# Altium PCB DSO.PcbDoc
Units mm, origin at the board's own origin, x right, y up, seen from the top; angles counter-clockwise.
Board outline 110 x 100 mm, 2 copper layers (Top Layer, Bottom Layer), stack 1.571 mm thick; 145 components, 121 nets, 556 pads, 27 vias.
Unrouted connection lines stored in the file: 193.
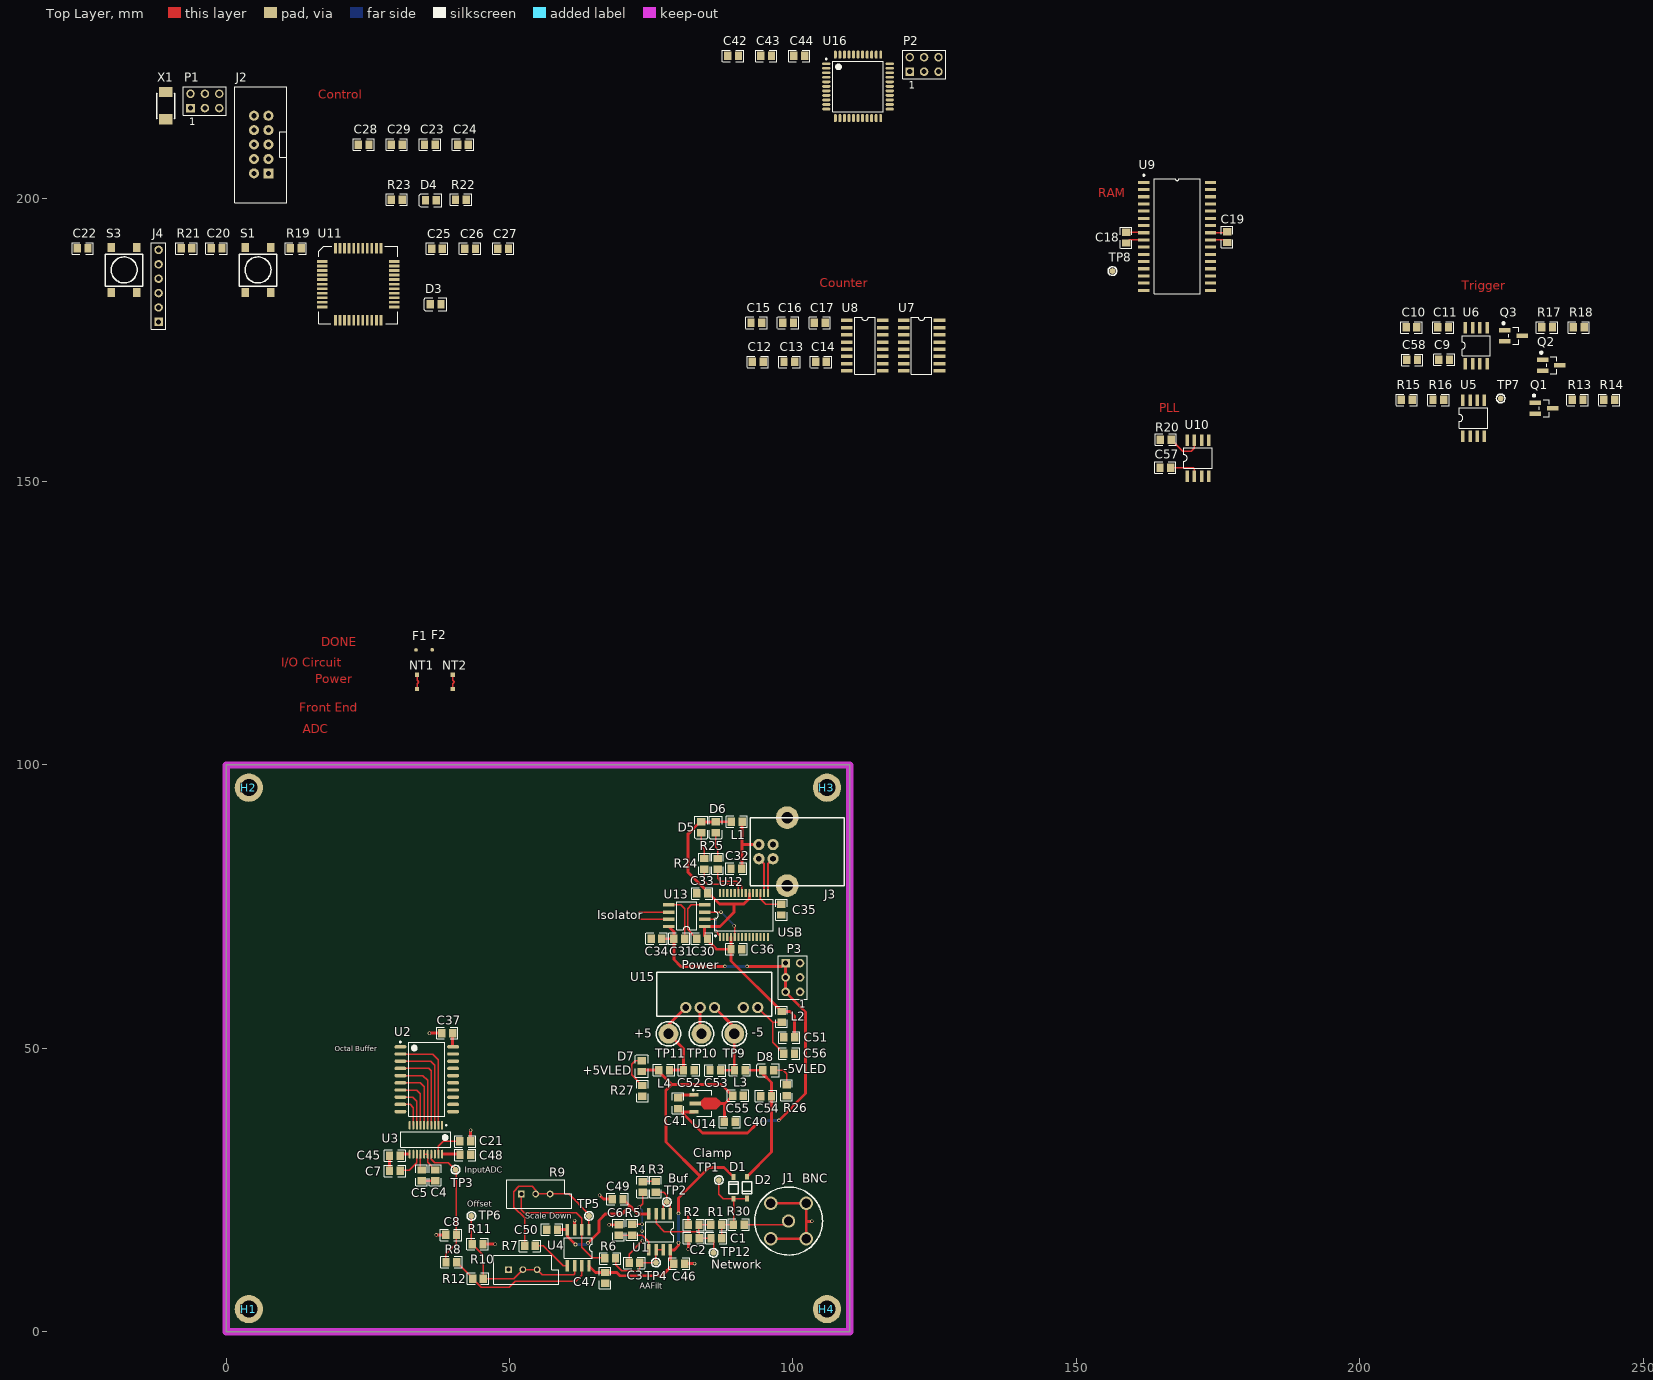
[diagram p0: Top Layer view]
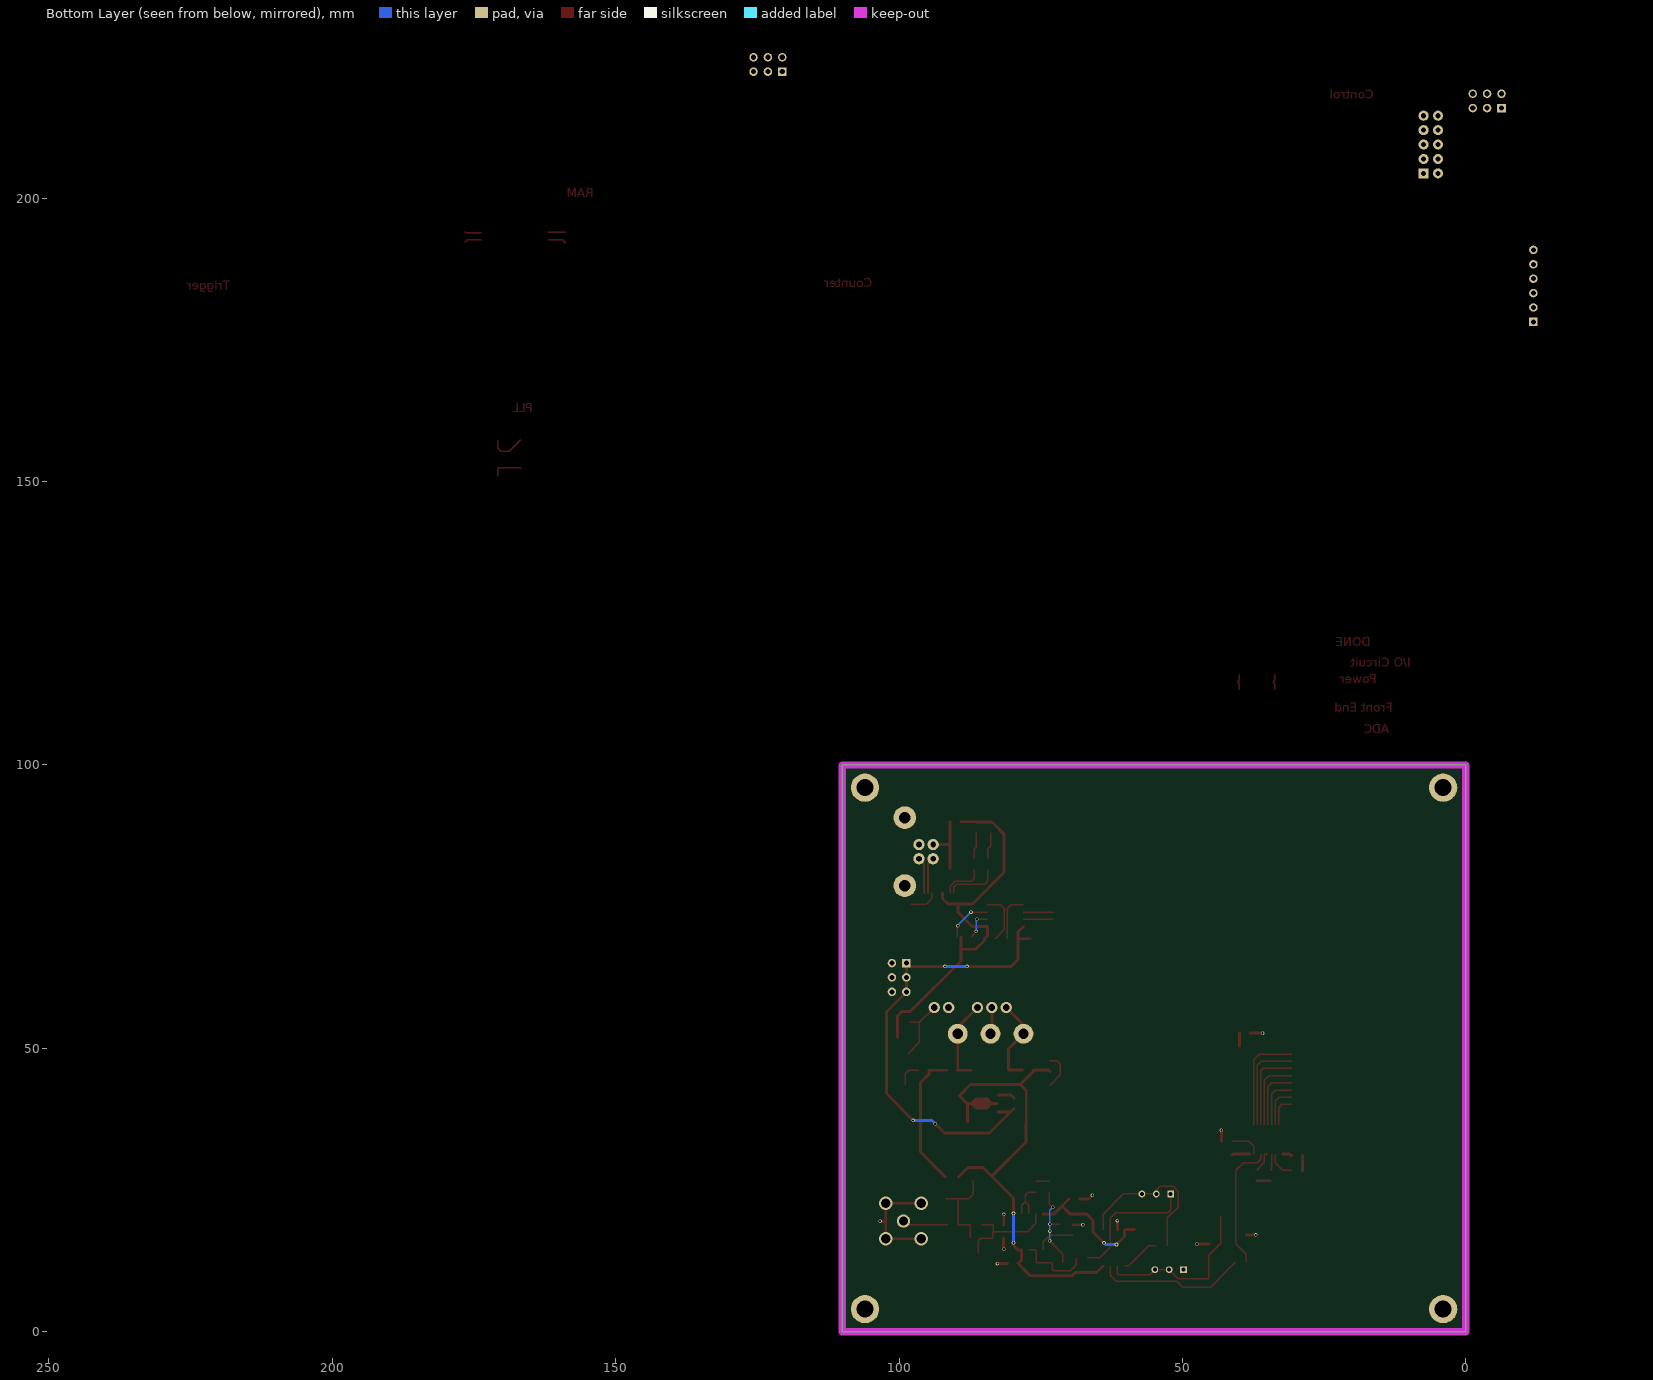
[diagram p1: Bottom Layer view, seen from below]

## Layer stack, top to bottom
Top Solder: solder mask 0.0102, Solder Resist, Dk 3.5
Top Layer: signal copper 0.0356
Dielectric1: core 1.5, FR-4, Dk 4.8
Bottom Layer: signal copper 0.0356
Bottom Solder: solder mask 0.0102, Solder Resist, Dk 3.5

## Board outline
0,0 110,0 110,100 0,100

## Design rules (kind name [scope] priority, off if disabled: settings)
Clearance [All] p1: gap=0.254
ComponentClearance [All] p1 off: gap=0.254 collisioncheckmode=3 verticalgap=0.254 showdistances=FALSE
DiffPairsRouting [All] p1: maxlimit=0.508 minlimit=0.254 mostfreqgap=0.254 toplayer_minwidth=0.381 toplayer_maxwidth=0.381 toplayer_prefwidth=0.381 bottomlayer_minwidth=0.381 bottomlayer_maxwidth=0.381 bottomlayer_prefwidth=0.381 maxuncoupledlength=12.7
FabricationTestPointUsage TestPointUsage [All] p1: valid=0 allowmultiple=FALSE
FabricationTestpoint Testpoint [All] p1: side=3 testpointundercomponent=TRUE minsize=1.016 maxsize=2.54 preferedsize=1.524 minholesize=0 maxholesize=1.016 preferedholesize=0.813 testpointgrid=0.025 allowsidetop=TRUE allowsidebottom=TRUE usegrid=TRUE gridtolerance=0
Height [All] p1: minheight=0 maxheight=200 prefheight=12.7
HoleSize [All] p1: absolutevalues=TRUE maxlimit=5.055 minlimit=0.381 maxpercent=80.000 minpercent=20.000
MinimumAnnularRing [All] p1: minimumring=0.127
PolygonConnect PolygonConnect_2 [(ObjectKind = 'Via') vs IsNamedPolygon('Bottom Layer-No Net') Or  IsNamedPolygon('Top Power') Or  IsNamedPolygon('TOP MCU VCC') Or  IsNamedPolygon('Top Analog') Or  IsNamedPolygon('Top USB') Or  IsNamedPolygon('Top Digital') Or  IsNamedPolygon('Top RAM VCC') Or  IsNamedPolygon('Bottom Power') Or  IsNamedPolygon('Bottom Analog') Or  IsNamedPolygon('Bottom Digital')] p1: connectstyle=Direct reliefconductorwidth=0.254 reliefentries=4 polygonreliefangle="90 Angle" airgapwidth=0.254
PolygonConnect PolygonConnect_1 [(ObjectKind = 'Via')] p2 off: connectstyle=Direct reliefconductorwidth=0.254 reliefentries=4 polygonreliefangle="90 Angle" airgapwidth=0.254
PolygonConnect [All] p3 off: connectstyle=Relief reliefconductorwidth=0.254 reliefentries=4 polygonreliefangle="90 Angle" airgapwidth=0.254
RoutingVias [All] p1: holewidth=0.381 width=0.635 viastyle="Through Hole" minholewidth=0.381 minwidth=0.635 maxholewidth=2.032 maxwidth=2.54
SilkToSolderMaskClearance SilkscreenOverComponentPads [IsPad] p1: minsilkscreentomaskgap=0.254 clearancetoexposedcopper=TRUE
SolderMaskExpansion [All] p1: expansion=0.152
Width USB_VCC_NET_WIDTH [InNet('USB_VCC_NET')] p1: maxlimit=0.508 minlimit=0.508 preferedwidth=0.508 minimp=50.000000 maximp=50.000000 favimp=50.000000
Width USBVCC_WIDTH [InNet('USBVCC')] p2: maxlimit=0.508 minlimit=0.508 preferedwidth=0.508 minimp=50.000000 maximp=50.000000 favimp=50.000000
Width +5_OUT [InNet('+5_OUTOFDC')] p3: maxlimit=0.508 minlimit=0.508 preferedwidth=0.508 minimp=50.000000 maximp=50.000000 favimp=50.000000
Width -5_OUT [InNet('-5_OUTOFDC')] p4: maxlimit=0.508 minlimit=0.508 preferedwidth=0.508 minimp=50.000000 maximp=50.000000 favimp=50.000000
Width +AVCC_WIDTH [InNet('+AVCC')] p5: maxlimit=0.508 minlimit=0.508 preferedwidth=0.508 minimp=50.000000 maximp=50.000000 favimp=50.000000
Width -AVCC_WIDTH [InNet('-AVCC')] p6: maxlimit=0.508 minlimit=0.508 preferedwidth=0.508 minimp=50.000000 maximp=50.000000 favimp=50.000000
Width DVCC_WIDTH [InNet('DVCC')] p7: maxlimit=0.508 minlimit=0.508 preferedwidth=0.508 minimp=50.000000 maximp=50.000000 favimp=50.000000
Width USB_GND_WIDTH [InNet('USBGND')] p8: maxlimit=0.508 minlimit=0.508 preferedwidth=0.508 minimp=50.000000 maximp=50.000000 favimp=50.000000
Width AGND_WIDTH [InNet('AGND')] p9: maxlimit=0.508 minlimit=0.508 preferedwidth=0.508 minimp=50.000000 maximp=50.000000 favimp=50.000000
Width PGND_WIDTH [InNet('PGND')] p10: maxlimit=0.508 minlimit=0.508 preferedwidth=0.508 minimp=50.000000 maximp=50.000000 favimp=50.000000
Width DGND_WIDTH [InNet('DGND')] p11: maxlimit=0.508 minlimit=0.508 preferedwidth=0.508 minimp=50.000000 maximp=50.000000 favimp=50.000000
Width Width_2 [All] p12: maxlimit=0.254 minlimit=0.254 preferedwidth=0.254
Width Width_1 [All] p13: maxlimit=0.254 minlimit=0.254 preferedwidth=0.254
23 further rules are at their usual default settings.

## Classes and differential pairs
component class U_DSO_Trig: C9 C10 C11 C58 Q1 Q2 Q3 R13 R14 R15 R16 R17 R18 TP7 U5 U6
component class U_DSO_ADC: C3 C4 C5 C6 C7 C8 C21 C37 C45 C46 C47 C48 C49 C50 R3 R4 R5 R6 R7 R8 R9 R10 R11 R12 TP3 TP4 TP5 TP6 U2 U3 U4
net class ADC_D[0..7]: ADC_D0 ADC_D1 ADC_D2 ADC_D3 ADC_D4 ADC_D5 ADC_D6 ADC_D7
net class ADC_A[0..15]: ADC_A0 ADC_A1 ADC_A2 ADC_A3 ADC_A4 ADC_A5 ADC_A6 ADC_A7 ADC_A8 ADC_A9 ADC_A10 ADC_A11 ADC_A12 ADC_A13 ADC_A14 ADC_A15
component class U_DSO_RAM: C18 C19 TP8 U9
component class U_DSO_Power: C40 C41 C51 C52 C53 C54 C55 C56 D7 D8 F1 F2 H1 H2 H3 H4 L2 L3 L4 NT1 NT2 P3 R26 R27 TP9 TP10 TP11 U14 U15
component class U_DSO_IO: C30 C31 C32 C33 C34 C35 C36 D5 D6 J3 L1 R24 R25 U12 U13
component class U_DSO_Front: C1 C2 D1 D2 J1 R1 R2 R30 TP1 TP2 TP12 U1
component class U_DSO_Counters: C12 C13 C14 C15 C16 C17 U7 U8
component class U_DSO_Control: C20 C22 C23 C24 C25 C26 C27 C28 C29 D3 D4 J2 J4 P1 R19 R21 R22 R23 S1 S3 U11 X1
component class U_DSO_Clock: C57 R20 U10
component class U_DSO_CPLD: C42 C43 C44 P2 U16
differential pair USB: +USB_P -USB_N

## Components (designator, comment, footprint, x,y, rotation, side; value= is the part's Value field where it differs from the comment)
C1 "5pF" 0805C 86.477,16.535 r180 top
C2 "5pF" 0805C 82.489,16.535 r180 top
C3 "22pF" 0805C 72.034,12.167 r180 top
C4 "0.1uF" 0805C 36.881,27.584 r90 top
C5 "0.1uF" 0805C 34.493,27.584 r90 top
C6 "10pF" 0805C 69.215,17.958 r90 top
C7 "0.1uF" 0805C 29.769,28.372 r0 top
C8 "47pF" 0805C 39.675,17.094 r180 top
C9 "100nF" 0805C 214.884,171.501 r0 top
C10 "100nF" 0805C 209.125,177.214 r0 top
C11 "100nF" 0805C 214.713,177.214 r0 top
C12 "100nF" 0805C 93.773,171.143 r0 top
C13 "100nF" 0805C 99.361,171.143 r0 top
C14 "100nF" 0805C 104.949,171.143 r0 top
C15 "100nF" 0805C 93.544,178.027 r0 top
C16 "100nF" 0805C 99.132,178.027 r0 top
C17 "100nF" 0805C 104.72,178.027 r0 top
C18 "100nF" 0805C 158.801,193.04 r270 top
C19 "100nF" 0805C 176.581,193.142 r90 top
C20 "100nF" 0805C -1.706,191.133 r0 top
C21 "100nF" 0805C 42.164,33.579 r0 top
C22 "100nF" 0805C -25.328,191.133 r0 top
C23 "100nF" 0805C 35.937,209.472 r0 top
C24 "100nF" 0805C 41.779,209.472 r0 top
C25 "100nF" 0805C 37.181,191.108 r0 top
C26 "100nF" 0805C 43.023,191.108 r0 top
C27 "100nF" 0805C 48.865,191.108 r0 top
C28 "18pF" 0805C 24.253,209.472 r0 top
C29 "18pF" 0805C 30.095,209.472 r0 top
C30 "100nF" 0805C 83.972,69.342 r180 top
C31 "100nF" 0805C 79.934,69.342 r0 top
C32 "100nF" 0805C 90.018,81.712 r180 top
C33 "1uF" 0805C 83.998,77.343 r180 top
C34 "1uF" 0805C 75.921,69.342 r0 top
C35 "100nF" 0805C 97.968,74.473 r270 top
C36 "100nF" 0805C 90.018,67.488 r0 top
C37 "100nF" 0805C 38.989,52.68 r180 top
C40 "1uF" 0805C 88.849,37.033 r0 top
C41 "1uF" 0805C 79.731,40.31 r90 top
C42 "100nF" 0805C 89.429,225.118 r0 top
C43 "100nF" 0805C 95.271,225.118 r0 top
C44 "100nF" 0805C 101.113,225.118 r0 top
C45 "100nF" 0805C 29.769,31.064 r180 top
C46 "100nF" 0805C 79.934,12.014 r0 top
C47 "100nF" 0805C 66.853,9.5 r270 top
C48 "100nF" 0805C 42.189,31.191 r0 top
C49 "100nF" 0805C 69.063,23.393 r180 top
C50 "100nF" 0805C 57.506,18.009 r180 top
C51 "100nF" 0805C 99.339,51.918 r180 top
C52 "10uF" 0805C 81.63,46.152 r0 top
C53 "10uF" 0805C 86.304,46.126 r180 top
C54 "100nF" 0805C 95.26,41.58 r180 top
C55 "100nF" 0805C 90.297,41.646 r0 top
C56 "10uF" 0805C 99.314,49.073 r0 top
C57 "100nF" 0805C 165.71,152.476 r180 top
C58 "10uF" 0805C 209.245,171.475 r0 top
D1 "Diode" SOD-123 89.51,25.375 r270 top
D2 "Diode" SOD-123 91.872,25.425 r90 top
D3 "LED_TRIG" 0805D-GREEN 36.953,181.278 r0 top
D4 "LED_DATA" 0805D-GREEN 36.115,199.642 r0 top
D5 "TX" 0805D-GREEN 83.82,89.002 r90 top
D6 "RX" 0805D-RED 86.36,89.002 r90 top
D7 "LED_+5" 0805D-GREEN 73.355,46.863 r270 top
D8 "LED_-5" 0805D-RED 95.631,46.126 r0 top
F1 "Fiducial" Fiducial 33.481,120.296 r0 top
F2 "Fiducial" Fiducial 36.347,120.32 r0 top
H1 "SCREW_HOLE" SCREW_HOLE 4,4 r0 top
H2 "SCREW_HOLE" SCREW_HOLE 4,96 r0 top
H3 "SCREW_HOLE" SCREW_HOLE 106,96 r0 top
H4 "SCREW_HOLE" SCREW_HOLE 106,4 r0 top
J1 "INPUT" BNC_VERT 99.212,19.533 r0 top
J2 "JTAG" BOXEDVERT10 7.438,204.392 r90 top
J3 "USB" USBPLUG 92.481,90.703 r270 top
J4 "Peripheral Chip Pins" HDR1X6 -11.942,178.179 r90 top
L1 "300mH" 0805 90.068,89.992 r0 top
L2 "300mA" 0805 98.003,55.55 r90 top
L3 "300mA" 0805 90.637,46.152 r180 top
L4 "300mA" 0805 77.251,46.152 r180 top
NT1 "NET_TIE" NET_TIE 33.676,113.384 r90 top net-tie
NT2 "NET_TIE" NET_TIE 39.954,113.384 r90 top net-tie
P1 "Header 3x2" HDR3x2 -3.763,217.168 r0 top
P2 "Header 3x2" HDR3x2 123.135,223.594 r0 top
P3 "Header 3x2" HDR3x2 99.974,62.509 r270 top
Q1 "BSS138" SOT23 232.519,162.939 r0 top
Q2 "BSS138" SOT23 233.807,170.51 r0 top
Q3 "BSS138" SOT23 227.134,175.715 r0 top
R1 "510K" 0805 86.451,18.872 r0 top
R2 "510K" 0805 82.464,18.847 r0 top
R3 "330" 0805 75.768,25.563 r270 top
R4 "270" 0805 73.482,25.537 r90 top
R5 "330" 0805 71.603,17.983 r270 top
R6 "499" 0805 67.742,12.929 r0 top
R7 "499" 0805 53.594,15.138 r180 top
R8 "39" 0805 39.726,12.268 r0 top
R9 "RPot" VR5 54.61,24.308 r0 top
R10 "RPot" VR5 52.324,10.947 r0 top
R11 "499" 0805 44.348,15.469 r0 top
R12 "499" 0805 44.425,9.373 r0 top
R13 "10K" 0805 238.437,164.438 r0 top
R14 "10K" 0805 244.025,164.438 r0 top
R15 "10K" 0805 208.287,164.438 r0 top
R16 "10K" 0805 213.875,164.438 r0 top
R17 "10K" 0805 233.052,177.214 r0 top
R18 "10K" 0805 238.64,177.214 r0 top
R19 "10k" 0805 12.264,191.133 r0 top
R20 "2.7K" 0805 165.76,157.404 r180 top
R21 "10k" 0805 -7.015,191.133 r0 top
R22 "220" 0805 41.398,199.744 r0 top
R23 "220" 0805 30.095,199.744 r0 top
R24 "270" 0805 84.353,82.55 r90 top
R25 "270" 0805 86.69,82.55 r90 top
R26 "330" 0805 98.882,42.596 r270 top
R27 "330" 0805 73.431,42.494 r270 top
R30 "100" 0805 90.439,18.898 r0 top
S1 "RESET" "SPST PB SWITCH SMD" 5.609,187.323 r90 top
S3 "TRIG" "SPST PB SWITCH SMD" -18.013,187.323 r90 top
TP1 "INPUT" Testpoin 86.919,26.746 r0 top
TP2 "INPUT" Testpoin 77.749,22.911 r90 top
TP3 "INPUT" Testpoin 40.462,28.6 r270 top
TP4 "INPUT" Testpoin 75.819,12.192 r90 top
TP5 "INPUT" Testpoin 64.008,20.422 r90 top
TP6 "INPUT" Testpoin 43.256,20.422 r90 top
TP7 "INPUT" Testpoin 224.873,164.666 r90 top
TP8 "INPUT" Testpoin 156.362,187.147 r90 top
TP9 "-5" "PIN 1.8mm" 89.646,52.578 r180 top
TP10 "GND" "PIN 1.8mm" 83.855,52.578 r180 top
TP11 "+5" "PIN 1.8mm" 78.039,52.578 r180 top
TP12 "INPUT" Testpoin 85.977,13.919 r90 top
U1 "LT1819" SOIC-8 76.479,17.628 r270 top
U2 "74HC541" SOT163-1_N 35.382,44.552 r0 top
U3 "ADS830E" TI-DBQ20_L 35.23,33.884 r270 top
U4 "LT1819" SOIC-8 62.103,14.783 r270 top
U5 "MCP4901" SOIC-8 220.098,161.212 r90 top
U6 "MAX9032" SOIC-8 220.555,173.988 r90 top
U7 "74HC590" SOIC-16 122.678,173.988 r0 top
U8 "74HC590" SOIC-16 112.696,173.988 r0 top
U9 "CY7C1019D" TSOP-32 167.788,193.267 r0 top
U10 "PT7C4511" SOIC-8 171.45,154.159 r90 top
U11 "ATMEGA16" QFP-48 23.288,184.834 r0 top
U12 "FT232RL" SSOP-28 91.338,73.533 r90 top
U13 "Si8421" SOIC-8 81.229,73.406 r180 top
U14 "MCP1700T-3302E/MB" SOT89 84.43,40.284 r0 top
U15 "RD0505D" SIP_NMG 93.787,57.201 r270 top
U16 "XC9536XL-10VQ44C" VQ44_L 111.476,219.734 r0 top
X1 "10Mhz" XTAL_FLAT_SMD -10.672,216.33 r90 top

## Footprints (in the part's own frame and the unit in brackets; to place one, negate y for a bottom-side part, rotate by r counter-clockwise, add the part's x,y. Pads: shape width x height; smd on the part's side, far side on the other; paste and mask are expansions set on the pad)
0805 [mm] "0805 Footprint"
  rect 1.3x1.5 smd: 1(-0.95,0) 2(0.95,0)
  silkscreen extent -1.87,-1.02 1.88,1.02, body extent -1,-0.63 1,0.62, height 0.5
0805C [mm] "0805 Footprint"
  rect 1.3x1.5 smd: 1(-0.95,0) 2(0.95,0)
  silkscreen extent -1.87,-1.02 1.88,1.02, body extent -1,-0.62 1,0.63, height 0.78
0805D-GREEN [mm] "0805 Diode"
  rect 1.3x1.5 smd: A(0.95,0) K(-0.95,0)
  silkscreen extent -2.03,-1.14 1.95,1.12, body extent -1.01,-0.62 1.01,0.63, height 1.1
0805D-RED [mm] "0805 Diode RED"
  rect 1.3x1.5 smd: A(0.95,0) K(-0.95,0)
  silkscreen extent -2.03,-1.14 1.95,1.12, body extent -1.05,-0.67 1.05,0.68, height 0.9
BNC_VERT [mil] "BNC vertical connector"
  round 92 hole 62: 1(0,0)
  round 95 hole 67: 2(-123.23,-123.23) 3(123.23,-123.23) 4(123.23,123.23) 5(-123.23,123.23)
  silkscreen extent -236,-236 236,236, body extent -217,-217 217,217, height 539
BOXEDVERT10 [mil] "IDC Header 2.54mm Boxed 10 pins"
  rect 70x70 hole 35.43: 1(0,0)
  round 70 hole 35.43: 2(0,100) 3(100,0) 4(100,100) 5(200,0) 6(200,100) 7(300,0) 8(300,100) 9(400,0) 10(400,100)
  silkscreen extent -203,-127 603,232, body extent -204,-129 604,237, height 359
Fiducial [mm]
  round 0.635 smd mask+0.635: ""(0,0)
HDR1X6 [mm] "Connector; Header; 6 Position"
  rect 1.5x1.5 hole 0.9: 1(0,0)
  round 1.5 hole 0.9: 2(2.54,0) 3(5.08,0) 4(7.62,0) 5(10.16,0) 6(12.7,0)
  silkscreen extent -1.27,-1.27 13.97,1.27
HDR3x2 [mm] "Connector; Header; 8x2 Position"
  rect 1.5x1.5 hole 0.9: 1(-2.54,-1.27)
  round 1.5 hole 0.9: 2(-2.54,1.27) 3(0,-1.27) 4(0,1.27) 5(2.54,-1.27) 6(2.54,1.27)
  silkscreen extent -3.81,-2.54 3.81,2.54, body extent -3.81,-2.54 3.81,2.54, height 9.5
NET_TIE [mm]
  rect 0.75x0.75 smd: 1(0,0) 2(2.54,0)
  Top Layer lines w0.254: 0,0 1.016,0 ccw(c1.27,0) 1.524,0 2.54,0
"PIN 1.8mm" [mm] "Single Pin"
  round 3.5 hole 1.8: 1(0,0)
  silkscreen extent -2.16,-2.16 2.16,2.16
QFP-48 [mm]
  rect 1.8x0.5 smd: 1(-6.35,4) 2(-6.35,3.2) 3(-6.35,2.4) 4(-6.35,1.6) 5(-6.35,0.8) 6(-6.35,0) 7(-6.35,-0.8) 8(-6.35,-1.6) 9(-6.35,-2.4) 10(-6.35,-3.2) 11(-6.35,-4) 23(6.35,-4) 24(6.35,-3.2) 25(6.35,-2.4) 26(6.35,-1.6) 27(6.35,-0.8) 28(6.35,0) 29(6.35,0.8) 30(6.35,1.6) 31(6.35,2.4) 32(6.35,3.2) 33(6.35,4)
  rect 0.5x1.8 smd: 12(-4,-6.35) 13(-3.2,-6.35) 14(-2.4,-6.35) 15(-1.6,-6.35) 16(-0.8,-6.35) 17(0,-6.35) 18(0.8,-6.35) 19(1.6,-6.35) 20(2.4,-6.35) 21(3.2,-6.35) 22(4,-6.35) 34(4,6.35) 35(3.2,6.35) 36(2.4,6.35) 37(1.6,6.35) 38(0.8,6.35) 39(0,6.35) 40(-0.8,6.35) 41(-1.6,6.35) 42(-2.4,6.35) 43(-3.2,6.35) 44(-4,6.35)
  silkscreen extent -6.98,-6.98 6.98,6.73, body extent -5.97,-6 6.03,6, height 1.13
SCREW_HOLE [mm]
  round 5 hole 3: 0(0,0)
SIP_NMG [mm] "SIP for NMG DC to DC"
  round 2 hole 1.2: 1(0,0) 2(0,-2.54) 3(0,-7.62) 4(0,-10.16) 5(0,-12.7)
  silkscreen extent -6.2,-17.82 1.5,2.5, body extent -6.2,-17.8 1.5,2.5, height 10.2
SOD-123 [mm] "SMD diode"
  rect 1x0.75 smd: A(1.925,0) K(-1.925,0)
  silkscreen extent -1.12,-0.85 1.05,0.85, body extent -1.93,-0.86 1.92,0.84, height 1.42
SOIC-8 [mil] "SOIC-8 Footprint"
  rect 80x24 smd: 1(-125,75) 2(-125,25) 3(-125,-25) 4(-125,-75) 5(125,-75) 6(125,-25) 7(125,25) 8(125,75)
  silkscreen extent -70,-98 70,98, body extent -118,-98 118,98, height 69
SOIC-16 [mil] "SOIC-16 Footprint"
  rect 80x24 smd: 1(-125,175) 2(-125,125) 3(-125,75) 4(-125,25) 5(-125,-25) 6(-125,-75) 7(-125,-125) 8(-125,-175) 9(125,-175) 10(125,-125) 11(125,-75) 12(125,-25) 13(125,25) 14(125,75) 15(125,125) 16(125,175)
  silkscreen extent -70,-198 70,198, body extent -118,-197 118,197, height 69
SOT23 [mm] "SOT23, 3-Leads, Body 3.0x2.5mm (max), Pitch 0.95mm, IPC Low Density"
  rect 2.038x0.8 smd: 1(-1.524,0.95)
  rect 2.032x0.8 smd: 2(-1.524,-0.95) 3(1.524,0)
  silkscreen extent -1.9,-1.5 0.94,2.36, body extent -1.32,-1.5 1.32,1.5, height 1.08
SOT89 [mm] "SOT89, 3-Leads, Body 4.50x2.50mm, Pitch 1.50mm, Lead Span 4.1mm, IPC Low Density"
  rect 1.6x0.6 smd: 1(-1.9,1.5) 3(-1.9,-1.5)
  rect 2x0.7 smd: 2(-1.7,0)
  Top Layer region: -0.7,0.35 -0.05,1 2.05,1 2.7,0.35 2.7,-0.35 2.05,-1 -0.05,-1 -0.7,-0.35
  silkscreen extent -2.15,-2.3 1.22,2.47, body extent -2.2,-2.3 1.85,2.3, height 1.6
SOT163-1_N [mm] "SOIC, 20-Leads, Body 12.7x7.5mm, Pitch 1.27mm, IPC Medium Density"
  oval 2.1x0.6 smd: 1(-4.65,5.715) 2(-4.65,4.445) 3(-4.65,3.175) 4(-4.65,1.905) 5(-4.65,0.635) 6(-4.65,-0.635) 7(-4.65,-1.905) 8(-4.65,-3.175) 9(-4.65,-4.445) 10(-4.65,-5.715) 11(4.65,-5.715) 12(4.65,-4.445) 13(4.65,-3.175) 14(4.65,-1.905) 15(4.65,-0.635) 16(4.65,0.635) 17(4.65,1.905) 18(4.65,3.175) 19(4.65,4.445) 20(4.65,5.715)
  silkscreen extent -4.77,-6.5 3.2,6.69, body extent -5.15,-6.5 5.15,6.5, height 2.65
"SPST PB SWITCH SMD" [mm] "Push Button Switch Surface Mount"
  rect 1.55x1.3 smd: 1(-3.975,2.25) 1(3.975,2.25) 2(-3.975,-2.25) 2(3.975,-2.25)
  silkscreen extent -2.83,-3.3 2.76,3.3, body extent -4.5,-3 4.5,3, height 5
SSOP-28 [mm] "Line Driver"
  oval 1.45x0.38 smd: 1(-3.9,4.225)
  rect 1.45x0.38 smd: 2(-3.9,3.575) 3(-3.9,2.925) 4(-3.9,2.275) 5(-3.9,1.625) 6(-3.9,0.975) 7(-3.9,0.325) 8(-3.9,-0.325) 9(-3.9,-0.975) 10(-3.9,-1.625) 11(-3.9,-2.275) 12(-3.9,-2.925) 13(-3.9,-3.575) 14(-3.9,-4.225) 15(3.9,-4.225) 16(3.9,-3.575) 17(3.9,-2.925) 18(3.9,-2.275) 19(3.9,-1.625) 20(3.9,-0.975) 21(3.9,-0.325) 22(3.9,0.325) 23(3.9,0.975) 24(3.9,1.625) 25(3.9,2.275) 26(3.9,2.925) 27(3.9,3.575) 28(3.9,4.225)
  silkscreen extent -3.8,-5.18 2.79,5.18, body extent -3.9,-5.1 3.9,5.1, height 2
Testpoin [mil] "Testpoint"
  round 40 smd: 1(0,0)
  silkscreen extent -30,-30 30,30
TI-DBQ20_L [mm] "SOP, 20-Leads, Body 8.65x3.9mm, Pitch 0.635mm, IPC High Density"
  oval 1.55x0.35 smd: 1(-2.55,2.857) 2(-2.55,2.222) 3(-2.55,1.587) 4(-2.55,0.952) 5(-2.55,0.317) 6(-2.55,-0.318) 7(-2.55,-0.953) 8(-2.55,-1.588) 9(-2.55,-2.223) 10(-2.55,-2.858) 11(2.55,-2.857) 12(2.55,-2.222) 13(2.55,-1.587) 14(2.55,-0.952) 15(2.55,-0.317) 16(2.55,0.318) 17(2.55,0.953) 18(2.55,1.588) 19(2.55,2.223) 20(2.55,2.858)
  silkscreen extent -2.67,-4.4 1.38,4.4, body extent -3,-4.4 3,4.4, height 1.75
TSOP-32 [mm]
  rect 2x0.55 smd: 1(-5.88,9.525) 2(-5.88,8.255) 3(-5.88,6.985) 4(-5.88,5.715) 5(-5.88,4.445) 6(-5.88,3.175) 7(-5.88,1.905) 8(-5.88,0.635) 9(-5.88,-0.635) 10(-5.88,-1.905) 11(-5.88,-3.175) 12(-5.88,-4.445) 13(-5.88,-5.715) 14(-5.88,-6.985) 15(-5.88,-8.255) 16(-5.88,-9.525) 17(5.88,-9.525) 18(5.88,-8.255) 19(5.88,-6.985) 20(5.88,-5.715) 21(5.88,-4.445) 22(5.88,-3.175) 23(5.88,-1.905) 24(5.88,-0.635) 25(5.88,0.635) 26(5.88,1.905) 27(5.88,3.175) 28(5.88,4.445) 29(5.88,5.715) 30(5.88,6.985) 31(5.88,8.255) 32(5.88,9.525)
  silkscreen extent -6.03,-10.16 4.05,10.94, body extent -5.88,-10.55 5.88,10.55, height 1.2
USBPLUG [mm]
  round 2 hole 1: 1(4.75,1.5) 2(7.25,1.5) 3(7.25,4) 4(4.75,4)
  round 4 hole 2: ""(0,6.5) ""(12,6.5)
  silkscreen extent 0,0 12,16.6, body extent -1.52,0.29 13.45,16.79, height 11.06
VQ44_L [mm] "Thin QFP, 44-Leads, Body 10x10mm, Pitch 0.8mm, IPC High Density"
  oval 1.45x0.5 smd: 1(-5.6,4) 2(-5.6,3.2) 3(-5.6,2.4) 4(-5.6,1.6) 5(-5.6,0.8) 6(-5.6,0) 7(-5.6,-0.8) 8(-5.6,-1.6) 9(-5.6,-2.4) 10(-5.6,-3.2) 11(-5.6,-4) 23(5.6,-4) 24(5.6,-3.2) 25(5.6,-2.4) 26(5.6,-1.6) 27(5.6,-0.8) 28(5.6,0) 29(5.6,0.8) 30(5.6,1.6) 31(5.6,2.4) 32(5.6,3.2) 33(5.6,4)
  oval 0.5x1.45 smd: 12(-4,-5.6) 13(-3.2,-5.6) 14(-2.4,-5.6) 15(-1.6,-5.6) 16(-0.8,-5.6) 17(0,-5.6) 18(0.8,-5.6) 19(1.6,-5.6) 20(2.4,-5.6) 21(3.2,-5.6) 22(4,-5.6) 34(4,5.6) 35(3.2,5.6) 36(2.4,5.6) 37(1.6,5.6) 38(0.8,5.6) 39(0,5.6) 40(-0.8,5.6) 41(-1.6,5.6) 42(-2.4,5.6) 43(-3.2,5.6) 44(-4,5.6)
  silkscreen extent -5.72,-4.45 4.45,4.95, body extent -5.97,-6 6.03,6, height 1.13
VR5 [mm] "Thru-Hole; 3 Leads"
  rect 1.2x1.2 hole 0.7: 1(-2.54,0)
  round 1.2 hole 0.7: 2(0,0) 3(2.54,0)
  silkscreen extent -5.08,-2.54 6.35,2.54
XTAL_FLAT_SMD [mm]
  rect 1.8x2.4 smd: 1(-2.412,0) 2(2.412,0)
  silkscreen extent -2.33,-1.59 2.21,1.6, body extent -2.58,-1.68 2.58,1.68, height 1.35

## Part data
C1 C2 C3 C4 C5 C6 C7 C8 C9 C10 C11 C12 C13 C14 C15 C16 C17 C18 C19 C20 C21 C22 C23 C24 C25 C26 C27 C28 C29 C30 C31 C32 C33 C34 C35 C36 C37 C40 C41 C42 C43 C44 C45 C46 C47 C48 C49 C50 C51 C52 C53 C54 C55 C56 C57 C58: library part C, "Capacitor"
D1 D2: library part D
D3 D4 D5 D7: library part "LED GREEN", "Light Emitting Diode"
D6 D8: library part "LED RED", "Light Emitting Diode"
J1: library part BNC, "BNC Straight"
J2: library part JTAG_CON, "JTAG_CON"
J3: library part USBPLUG, "USB B Type Connector"
J4: library part "Header 6", "Header, 6-Pin"
L1 L2 L3 L4: library part I, "Inductor"
NT1 NT2: "Net Tie"
P1 P2 P3: "Header, 5-Pin"
Q1 Q2 Q3: library part MOSFET-N, "N-Channel MOSFET"
R1 R2 R3 R4 R5 R6 R7 R8 R11 R12 R13 R14 R15 R16 R17 R18 R19 R20 R21 R22 R23 R24 R25 R26 R27 R30: library part R, "Resistor"
R9 R10: "Potentiometer"
S1 S3: library part SW_PB_1P1T4, "Momentary Push Button Switch 1P 1T 2pins"
TP1 TP2 TP3 TP4 TP5 TP6 TP7 TP8 TP12: library part "Test Point", "Pad"
TP9 TP10 TP11: library part WIRE, "Pad"
U1 U4: "OpAmp High Frequency Dual"
U2: "(ADV) Octal Buffer, Line Driver"
U3: "8-Bit, 60 MSPS ADC Single-Ended / Differential Input, Internal / External Reference and Programmble Input Range, -40 to 85 degC, 20-pin SOP (DBQ20), Green (RoHS & no Sb/Br)"
U5: "DAC 8bit SPI"
U6: "Dual Comparator"
U7 U8: "8-Bit Binary Counter Register"
U9: "SRAM 128k x 8"
U10: "PLL Clock Multiplier"
U11: "ATMEGA16 Microcontroller"
U12: "USB to Serial bridge"
U13: "Dual Channel Digital Isolator Both Ways"
U14: library part MCP1700T, "Low Quiescent Current LDO, 3-Pin SOT-89, Extended Temperature, Tape and Reel"
U15: "(ADV) DC to DC converter 5V in +-5V out"
U16: library part XC9536XL-10VQG44C, "FastFLASH XC900XL, 3.3V High-Performance 36 Macrocell CPLD, 34 User I/Os, 44-Pin VQFP, Speed Grade 10, Commercial Grade"
X1: library part XTAL, "Crystal Oscillator"

## Via types
v1: diameter 0.635, hole 0.381, Top Layer to Bottom Layer, tented both sides, 27 vias

## Nets (pads, with @x,y where several pads share a name; then routed paths per layer and width w, separated by ;. In a path a pad name is that pad's centre, name@x,y a point inside that pad or via, vN(x,y) a via of type N, cw(c..) or ccw(c..) an arc to the next point about the centre after c; other vN are vias at no path point)
3V3: C35.1 U12.17 | length 5.2
  Top Layer w0.254: U12.17 94.263,76.374 95.214,75.423 C35.1
+5_OUTOFDC: C52.1 L4.1 TP11.1 U15.5 | length 15.9
  Top Layer w0.508: L4.1 C52.1 80.68,49.936 TP11.1 78.039,54.153 U15.5
+AVCC: C9.1 C10.1 C11.1 C21.1 C40.1 C45.1 C46.1 C47.1 C55.1 C58.1 D1.K D7.A L4.2 R14.2 R16.2 R18.2 U1.8 U3.11 U3.19 U4.8 U5.1 U5.6 U6.8 U14.2 | length 96.6
  Top Layer w0.254: U3.19 37.452,32.728 38.303,33.579 C21.1
  Top Layer w0.508: C45.1 30.988,31.334 U3.11@32.324,31.334 ; U4.8 65.166,10.45 C47.1 68.9,10.45 69.469,9.881 76.85,9.881 C46.1 78.384,12.614 U1.8 79.07,14.453 79.807,15.189 v1(79.807,15.697) ; D7.A 73.594,46.152 L4.2 ; L4.2@76.301,45.933 78.623,43.612 ; v1(79.807,20.879) 79.807,23.571 85.192,28.956 87.853,28.956 D1.K ; U14.2 87.986,40.284 C55.1 87.381,43.612 78.623,43.612 ; 83.629,27.445 77.622,33.452 77.622,36.805 77.546,36.881 77.546,42.535 78.623,43.612 ; C40.1 87.899,40.198
  Bottom Layer w0.508: v1(79.807,15.697) v1(79.807,20.879)
-5_OUTOFDC: C53.1 L3.2 TP9.1 U15.3 | length 14.9
  Top Layer w0.508: U15.3 89.646,53.721 TP9.1 L3.2@89.646,46.142 ; C53.1 L3.2@89.662,46.126
-AVCC: C49.1 C50.1 C54.1 D2.A D8.K L3.1 U1.4 U4.4 | length 48.3
  Top Layer w0.508: C50.1 U4.4@60.147,18.009 ; U4.4 60.198,16.815 v1(61.62,15.392) ; v1(63.83,15.672) 65.761,17.602 65.761,19.634 66.929,20.803 69.86,20.803 71.217,22.159 ; C49.1 72.603,20.803 U1.4 ; L3.1@91.612,46.126 D8.K 94.681,45.527 96.21,43.998 C54.1 96.21,31.688 D2.A
  Bottom Layer w0.508: v1(61.62,15.392) 63.551,15.392 v1(63.83,15.672)
AA_IN: R3.2 TP2.1 U1.1 U1.2 | length 8.1
  Top Layer w0.254: R3.2 77.216,24.613 77.749,24.079 TP2.1 ; U1.2 77.114,22.276 TP2.1 ; U1.1 78.384,22.276 TP2.1
AA_OUT: C3.1 R6.2 TP4.1 U1.6 U1.7 | length 13.5
  Top Layer w0.254: R6.2 68.692,11.826 69.799,10.719 72.669,10.719 72.984,11.034 C3.1 73.01,12.192 TP4.1 U1.6@75.819,14.427 ; U1.6 U1.7
ADC_A0: U7.15 U9.16
ADC_A1: U7.1 U9.15
ADC_A2: U7.2 U9.14
ADC_A3: U7.3 U9.13
ADC_A4: U7.4 U9.4
ADC_A5: U7.5 U9.3
ADC_A6: U7.6 U9.2
ADC_A7: U7.7 U9.1
ADC_A8: U8.15 U9.31
ADC_A9: U8.1 U9.30
ADC_A10: U8.2 U9.29
ADC_A11: U8.3 U9.21
ADC_A12: U8.4 U9.20
ADC_A13: U8.5 U9.19
ADC_A14: U8.6 U9.18
ADC_A15: U8.7 U9.17
ADC_CLK: TP8.1 U3.10 U9.12 U16.41
ADC_D0: U2.18 U9.6
ADC_D1: U2.17 U9.7
ADC_D2: U2.16 U9.10
ADC_D3: U2.15 U9.11
ADC_D4: U2.14 U9.22
ADC_D5: U2.13 U9.23
ADC_D6: U2.12 U9.26
ADC_D7: U2.11 U9.27
AGND: C2.2 C4.1 C5.1 C6.2 C7.1 C8.2 C9.2 C10.2 C11.2 C21.2 C45.2 C46.2 C47.2 C49.2 C50.2 C58.2 J1.2 J1.3 J1.4 J1.5 NT1.2 R2.1 R11.2 R26.2 R27.2 U4.3 U5.5 U5.7 U6.4 | length 41.9
  Top Layer w0.508: C7.1 C45.2 ; C5.1 C4.1 ; v1(37.059,17.094) C8.2 ; C21.2 v1(43.114,35.55) ; R11.2 v1@47.244,15.469 ; U4.3 v1(61.468,19.609) ; v1(65.888,24.079) 66.573,23.393 C49.2 ; v1(67.564,18.872) 69.179,18.872 C6.2 ; C46.2 v1(82.652,12.014) ; R2.1 v1(81.514,20.706) ; v1(81.534,14.554) 81.539,14.559 C2.2 ; J1.2 J1.3 102.342,19.482 ; J1.5 J1.4 102.342,19.482 ; v1(103.327,19.482) 102.342,19.482
  other v1: 47.473,15.443
CH1_NORM: C8.1 R8.1 TP3.1 U3.17 U6.3 | length 23.1
  Top Layer w0.254: U3.17 36.182,30.467 36.792,29.858 39.205,29.858 TP3.1 40.625,28.438 C8.1 40.625,15.555 38.776,13.706 R8.1
CLEAR_COUNT: U7.10 U8.10 U16.31
COUNTER_CLK: U7.11 U7.13 U8.13 U16.29
CPLD_TCK: P2.6 U16.11
CPLD_TD0: P2.4 U16.24
CPLD_TDI: P2.2 U16.9
CPLD_TMS: P2.5 U16.10
CS_SCREEN: J4.3 U11.25
DGND: C12.2 C13.2 C14.2 C15.2 C16.2 C17.2 C18.2 C19.2 C20.2 C22.2 C23.2 C24.2 C25.2 C26.2 C27.2 C28.2 C29.2 C34.1 C37.2 C41.2 C42.2 C43.2 C44.2 C48.2 C57.2 J2.2 J2.10 NT2.2 P2.1 S1.2 S3.2 U2.10 U3.1 U3.12 U3.18 U7.8 U7.14 U8.8 U8.14 U9.5 U9.9 U9.25 U10.3 U11.6 U11.18 U11.28 U11.39 U14.1 U16.4 U16.8 U16.13 U16.14 U16.16 U16.17 U16.18 U16.19 U16.20 U16.21 U16.22 U16.23 U16.25 U16.27 U16.32 U16.33 U16.34 U16.36 U16.37 U16.38 U16.39 U16.40 U16.42 | length 11.6
  Top Layer w0.254: C18.2 159.343,192.632 U9.9 ; U9.25 176.391,193.902 C19.2
  Top Layer w0.508: v1(35.839,52.654) 35.839,52.68 C37.2 ; C41.2 80.255,41.784 U14.1
DVCC: C12.1 C13.1 C14.1 C15.1 C16.1 C17.1 C18.1 C19.1 C23.1 C24.1 C25.1 C26.1 C27.1 C31.1 C34.2 C37.1 C41.1 C42.1 C43.1 C44.1 C48.1 C57.1 D3.A D4.A J2.4 J2.7 P1.2 P2.3 P3.1 P3.3 P3.5 Q1.1 Q2.1 Q3.1 R13.2 R15.2 R17.2 R19.2 R20.2 R21.2 U2.20 U3.20 U7.16 U8.16 U9.8 U9.24 U9.32 U10.2 U11.5 U11.17 U11.27 U11.29 U11.38 U13.8 U14.3 U16.15 U16.26 U16.35 | length 100
  Top Layer w0.254: C18.1 161.82,193.99 U9.8 ; C57.1 170.637,152.476 170.815,152.298 U10.2 ; U9.24 176.141,192.632 C19.1
  Top Layer w0.508: U3.20@38.135,31.334 41.097,31.334 C48.1 ; U2.20@39.939,50.36 C37.1 ; C34.2 C31.1 ; U13.8 78.984,70.571 C31.1 ; C41.1 C41.1@80.306,38.784 ; U14.3 C41.1@80.306,38.784 ; v1(87.986,64.465) 80.213,64.465 78.984,65.695 C31.1 ; v1(91.897,64.465) 97.968,64.465 98.628,65.126 P3.1 P3.3 P3.5 102.235,56.439 102.235,42.012 v1(97.511,37.287) ; v1(93.599,36.703) 91.948,35.052 84.038,35.052 C41.1@80.306,38.784
  Bottom Layer w0.508: v1(87.986,64.465) v1(91.897,64.465) ; v1(93.599,36.703) 94.183,37.287 v1(97.511,37.287)
EDGE_SW: U11.15 U16.5
ENABLE: U11.16 U16.1
ENABLE_COUNT: U7.12 U8.12 U16.30
FAST_CLK: U10.5 U16.44
FILL_COMP: U11.11 U16.28
FORCE: U11.26 U16.2
FULL: U8.9 U16.7
GND: P1.6
IN_CLK: U10.1 U11.14
LED_DATA: R23.1 U11.20
LED_TRIG: R22.1 U11.19
NetC1_1: C1.1 D1.A D2.K R1.2 R30.1 TP1.1 | length 16.7
  Top Layer w0.254: TP1.1 86.919,24.232 87.701,23.45 D1.A ; C1.1@87.401,16.561 R1.2 ; R1.2@87.427,18.898 R30.1 89.51,18.918 D1.A ; D2.K@91.821,23.45 D1.A
NetC1_2: C1.2 C2.1 R1.1 R2.2 TP12.1 U1.3 | length 19.2
  Top Layer w0.254: U1.3 75.844,19.101 77.279,17.666 83.375,17.666 83.414,17.628 ; R1.1 83.439,18.872 R2.2 83.414,17.628 ; TP12.1 85.977,16.085 C1.2 C2.1 83.439,17.602 83.414,17.628
NetC3_2: C3.2 R4.1 R5.1 | length 15.6
  Top Layer w0.254: C3.2 71.084,13.706 v1(73.431,16.053) ; R5.1 v1@73.34,18.933 ; v1(72.873,21.971) 73.482,22.581 R4.1
  Bottom Layer w0.254: v1(72.873,21.971) 73.406,21.438 73.406,18.999 v1(73.381,18.974) v1(73.381,17.755) 73.431,17.704 v1(73.431,16.053)
NetC4_2: C4.2 U3.15 U3.16 | length 4
  Top Layer w0.254: U3.15 U3.16 35.547,29.868 C4.2
NetC5_2: C5.2 U3.14 | length 2.9
  Top Layer w0.254: U3.14 34.277,28.75 C5.2
NetC6_1: C6.1 R5.2 U1.5 | length 7.3
  Top Layer w0.254: C6.1 R5.2@71.577,17.008 ; R5.2 73.442,17.033 74.574,15.9 U1.5
NetC30_2: C30.2 U13.4 | length 9.3
  Top Layer w0.254: C30.2 81.392,70.973 81.392,74.635 82.067,75.311 U13.4
NetC31_2: C31.2 U13.5 | length 8.4
  Top Layer w0.254: U13.5 80.188,75.311 80.884,74.615 C31.2
NetC56_1: C56.1 L2.1 U15.1 | length 11.6
  Top Layer w0.254: U15.1 96.388,54.6 ; L2.1 96.388,54.6 ; C56.1 96.388,51.049 96.388,54.6
NetD3_K: D3.K R22.2
NetD4_K: D4.K R23.2
NetD5_K: D5.K R24.2 | length 4.8
  Top Layer w0.254: D5.K 83.82,85.776 84.353,85.242 R24.2
NetD6_K: D6.K R25.2 | length 4.7
  Top Layer w0.254: D6.K 86.36,85.522 86.69,85.192 R25.2
NetD7_K: D7.K R27.1 | length 6.7
  Top Layer w0.254: D7.K@73.279,47.889 D7.K 72.172,47.813 71.552,47.193 71.552,45.324 R27.1
NetD8_A: D8.A R26.1 | length 4.5
  Top Layer w0.254: D8.A 98.273,46.126 98.882,45.517 R26.1
NetJ1_1: J1.1 R30.2 | length 8.1
  Top Layer w0.254: R30.2 98.577,18.898 J1.1
NetQ1_3: Q1.3 R14.1 U5.2
NetQ2_3: Q2.3 R16.1 U5.3
NetQ3_3: Q3.3 R18.1 U5.4
NetR3_1: R3.1 R4.2 | length 2.3
  Top Layer w0.254: R4.2 73.508,26.513 R3.1
NetR6_1: R6.1 R9.1 U4.2 | length 24.1
  Top Layer w0.254: R9.1 52.07,21.539 52.603,21.006 61.798,21.006 62.738,20.066 U4.2 62.738,14.935 64.592,13.081 66.639,13.081 R6.1
NetR7_1: R7.1 U4.5 | length 7.1
  Top Layer w0.254: R7.1 55.931,15.138 59.461,11.608 U4.5
NetR8_2: R8.2 R12.1 U4.7 | length 26.5
  Top Layer w0.254: R8.2 43.475,9.469 R12.1 43.475,9.334 44.985,7.823 49.918,7.823 51.01,8.915 61.646,8.915 62.738,10.008 U4.7
NetR10_2: R10.2 R10.3 R11.1 R12.2 TP6.1 U4.6 | length 30.5
  Top Layer w0.254: TP6.1 43.256,15.572 45.375,13.454 R12.2 50.749,9.373 R10.2 R10.3 55.778,10.033 61.29,10.033 61.468,10.211 U4.6
NetR20_1: R20.1 U10.7 | length 6.6
  Top Layer w0.254: R20.1 168.742,155.372 170.282,155.372 170.815,155.905 U10.7
NetU2_2: U2.2 U3.2 | length 18.7
  Top Layer w0.254: U2.2 36.449,48.997 37.452,47.993 U3.2
NetU2_3: U2.3 U3.3 | length 16.9
  Top Layer w0.254: U2.3 36.068,47.727 36.817,46.977 U3.3
NetU2_4: U2.4 U3.4 | length 15.2
  Top Layer w0.254: U2.4 35.738,46.457 36.182,46.012 U3.4
NetU2_5: U2.5 U3.5 | length 13.1
  Top Layer w0.254: U2.5 34.696,45.187 35.547,44.336 U3.5
NetU2_6: U2.6 U3.6 | length 11.3
  Top Layer w0.254: U2.6 34.214,43.917 34.912,43.218 U3.6
NetU2_7: U2.7 U3.7 | length 9.4
  Top Layer w0.254: U2.7 33.63,42.647 34.277,41.999 U3.7
NetU2_8: U2.8 U3.8 | length 7.4
  Top Layer w0.254: U2.8 32.929,41.377 33.642,40.663 U3.8
NetU2_9: U2.9 U3.9 | length 5.6
  Top Layer w0.254: U2.9 32.436,40.107 33.007,39.535 U3.9
OVERFLOW: U7.9 U8.11
PGND: C40.2 C52.2 C53.2 C54.2 C55.2 NT1.1 NT2.1 P3.2 P3.4 P3.6 TP10.1 U15.4 | length 5
  Top Layer w0.254: TP10.1@83.627,52.807 TP10.1 ; U15.4 U15.4@83.855,56.972
  Top Layer w0.508: TP10.1@83.627,52.807 U15.4
PLL_S0: U10.6 U11.41
PLL_S1: U10.4 U11.40
R\A\M\_\R\E\A\D\: U9.28 U16.6
RAM_READ: U2.1 U2.19 U11.42 U16.3
REFB: C7.2 R10.1 U3.13 | length 5
  Top Layer w0.254: C7.2 30.846,28.499 32.283,28.499 33.642,29.858 U3.13
RST: C20.1 P1.5 R19.1 S1.1 U11.4
RX: J4.1 U11.9 U13.7 | length 5.2
  Top Layer w0.254: 72.873,72.771 U13.7
RX_ISO: U12.1 U13.2 | length 5.4
  Top Layer w0.254: U13.2 v1(86.284,72.771) ; v1(86.385,70.637) 87.113,69.909 U12.1
  Bottom Layer w0.254: v1(86.284,72.771) 86.385,72.669 v1(86.385,70.637)
RXLED: R25.1 U12.22 | length 7.7
  Top Layer w0.254: R25.1 86.69,79.985 87.173,79.502 90.063,79.502 90.934,78.631 90.934,77.433 U12.22
SCK: J4.4 P1.3 Q2.2 R15.1 U11.3
SDA: J4.6 P1.4 Q3.2 R17.1 U11.1
SLA: J4.5 P1.1 U11.2
SLOW_CLK: U11.13 U16.43
T_CS: Q1.2 R13.1 U11.43
TCK: J2.1 U11.21
TDI: J2.9 U11.24
TDO: J2.3 U11.23
TMS: J2.5 U11.22
TRIG: U6.1 U16.12
TRIG_BTN: C22.1 R21.1 S3.1 U11.12
TX: J4.2 U11.10 U13.6 | length 5.3
  Top Layer w0.254: 72.746,74.041 U13.6
TX_ISO: U12.5 U13.3 | length 8.3
  Top Layer w0.254: U13.3 v1(87.3,74.041) ; v1(89.611,71.628) 89.698,71.541 U12.5@89.698,69.633
  Bottom Layer w0.254: v1(87.3,74.041) 89.611,71.73 v1(89.611,71.628)
TXLED: R24.1 U12.23 | length 9.6
  Top Layer w0.254: R24.1 84.353,79.553 84.912,78.994 89.853,78.994 90.363,78.483 U12.23 U12.23@90.284,77.433
USB_N: J3.2 U12.16 | length 6.4
  Top Layer w0.381: J3.2 94.913,82.521 U12.16
USB_P: J3.3 U12.15 | length 6.4
  Top Layer w0.381: U12.15 95.563,82.535 J3.3
USB_VCC_NET: C32.1 J3.1 L1.2 | length 11.1
  Top Layer w0.508: C32.1@91.018,81.763 L1.2 ; 91.094,85.953 J3.1
USBGND: C32.2 C33.2 C35.2 C36.2 C51.2 C56.2 J3.4 U12.7 U12.18 U12.21 U12.25 U12.26 U15.2
USBVCC: C30.1 C33.1 C36.1 C51.1 D5.A D6.A L1.1 L2.2 U12.4 U12.20 U13.1 | length 68.1
  Top Layer w0.508: D6.A D5.A 83.602,89.952 81.509,87.859 81.509,81.001 87.046,75.463 91.327,75.463 92.313,76.45 U12.20 ; D6.A@86.401,89.992 L1.1 ; C36.1@89.063,67.492 U12.4 ; 89.611,75.388 89.611,74.016 87.097,71.501 U13.1 84.404,69.86 C30.1 84.922,69.052 86.487,67.488 C36.1 89.068,65.435 L2.2 99.507,56.5 100.289,55.717 C51.1
V_AMP_OUT: R7.2 R9.2 R9.3 TP5.1 U4.1 | length 29.2
  Top Layer w0.254: R7.2 52.644,20.076 50.724,21.996 50.724,24.7 51.652,25.629 53.975,25.629 54.61,24.994 R9.2 R9.3 60.427,24.308 64.008,20.726 TP5.1 U4.1
VOUT_DAC: TP7.1 U5.8 U6.2
XTAL1: C29.1 U11.8 X1.2
XTAL2: C28.1 U11.7 X1.1
pads on no net: F1. F2. H1.0 H2.0 H3.0 H4.0 J2.6 J2.8 J3. U6.5 U6.6 U6.7 U10.8 U11.30 U11.31 U11.32 U11.33 U11.34 U11.35 U11.36 U11.37 U11.44 U12.2 U12.3 U12.6 U12.8 U12.9 U12.10 U12.11 U12.12 U12.13 U12.14 U12.19 U12.24 U12.27 U12.28

## Keep-outs
Keep-Out Layer:
  the board outline again, w1.27

## Other copper
Top Layer:
  text "CPLD" at 104.47,231.546 h1.52
  text "Control" at 16.231,217.551 h1.52
  text "RAM" at 153.873,200.203 h1.52
  text "Counter" at 104.724,184.328 h1.52
  text "Trigger" at 217.957,183.845 h1.52
  text "PLL" at 164.668,162.204 h1.52
  text "DONE" at 16.789,120.904 h1.52
  text "I/O Circuit" at 9.703,117.373 h1.52
  text "Power" at 15.672,114.376 h1.52
  text "Front End" at 12.852,109.373 h1.52
  text "ADC" at 13.513,105.613 h1.52

## Silkscreen, mask and mechanical layers (free items; w line width, h text height)
Top Overlay:
  text "Isolator" at 65.43,72.746 h1.52
  text "USB" at 97.307,69.672 h1.52
  text "Power" at 80.391,63.983 h1.52
  text "-5" at 92.685,52.019 h1.52
  text "+5" at 72.009,51.892 h1.52
  text "Octal Buffer" at 19.177,49.479 h0.9
  text "-5VLED" at 98.247,45.593 h1.52
  text "+5VLED" at 62.89,45.364 h1.52
  text "Clamp" at 82.423,30.81 h1.52
  text "InputADC" at 42.088,28.084 h1
  text "Buf" at 77.953,26.289 h1.52
  text "BNC" at 101.6,26.289 h1.52
  text "Offset" at 42.57,22.022 h1
  text "Scale Down" at 52.781,19.939 h1
  text "Network" at 85.573,11.1 h1.52
  text "AAFilt" at 72.949,7.595 h1
Mechanical 1:
  the board outline again, w0.254

## Text inside footprints (layer, text, board x,y; h text height)
P1: Top Overlay "1" at -6.507,212.85 h1.27
P2: Top Overlay "1" at 120.392,219.276 h1.27
P3: Top Overlay "1" at 101.067,57.15 h1.27